# Altium PCB PCB2.PcbDoc
Units mil, origin at the board's own origin, x right, y up, seen from the top; angles counter-clockwise.
Board outline 2020 x 1755 mil, 2 copper layers (Top Layer, Bottom Layer); 13 components, 8 nets, 43 pads, 0 vias.
Unrouted connection lines stored in the file: 29.
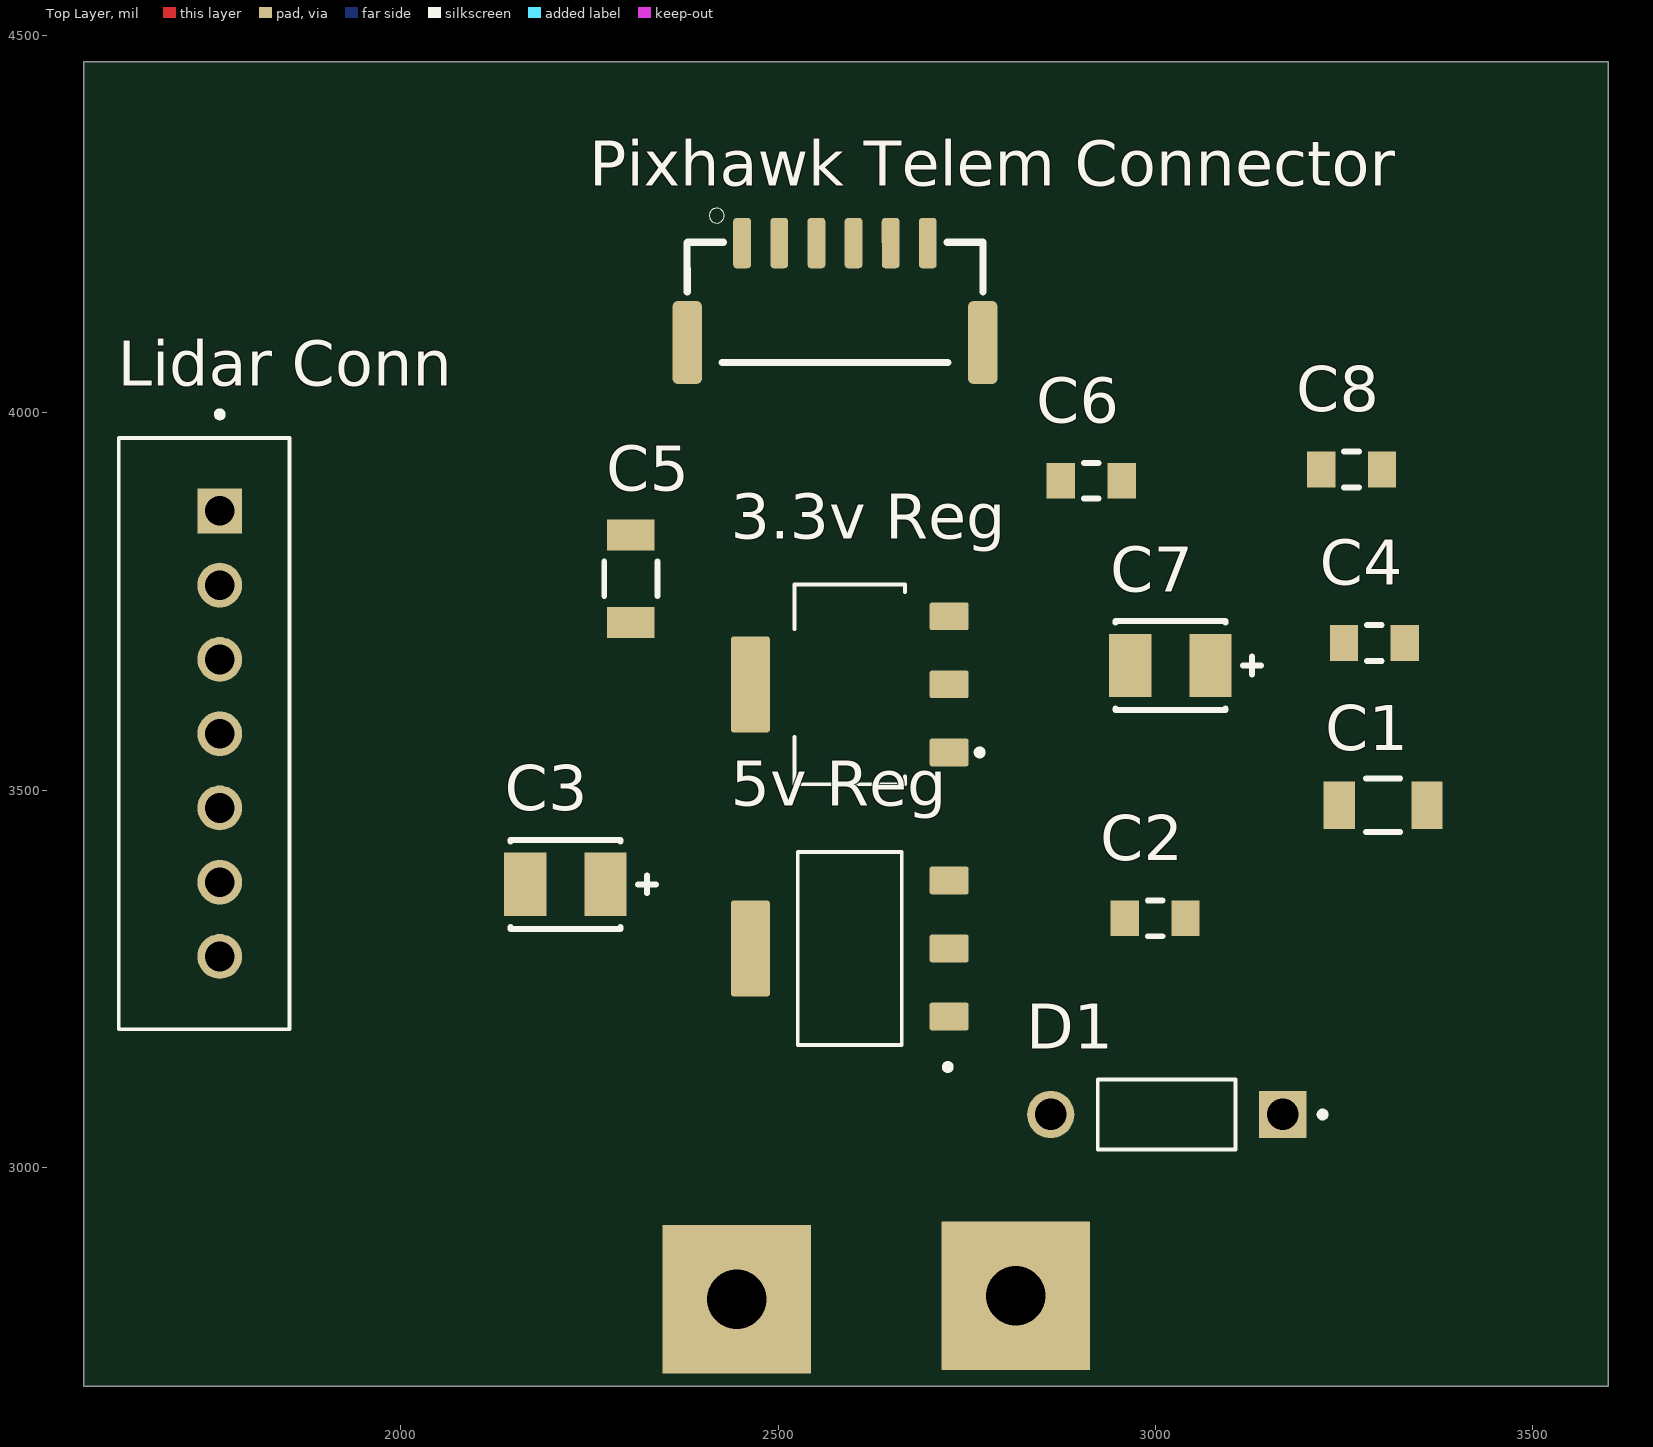
[diagram p0: Top Layer view]
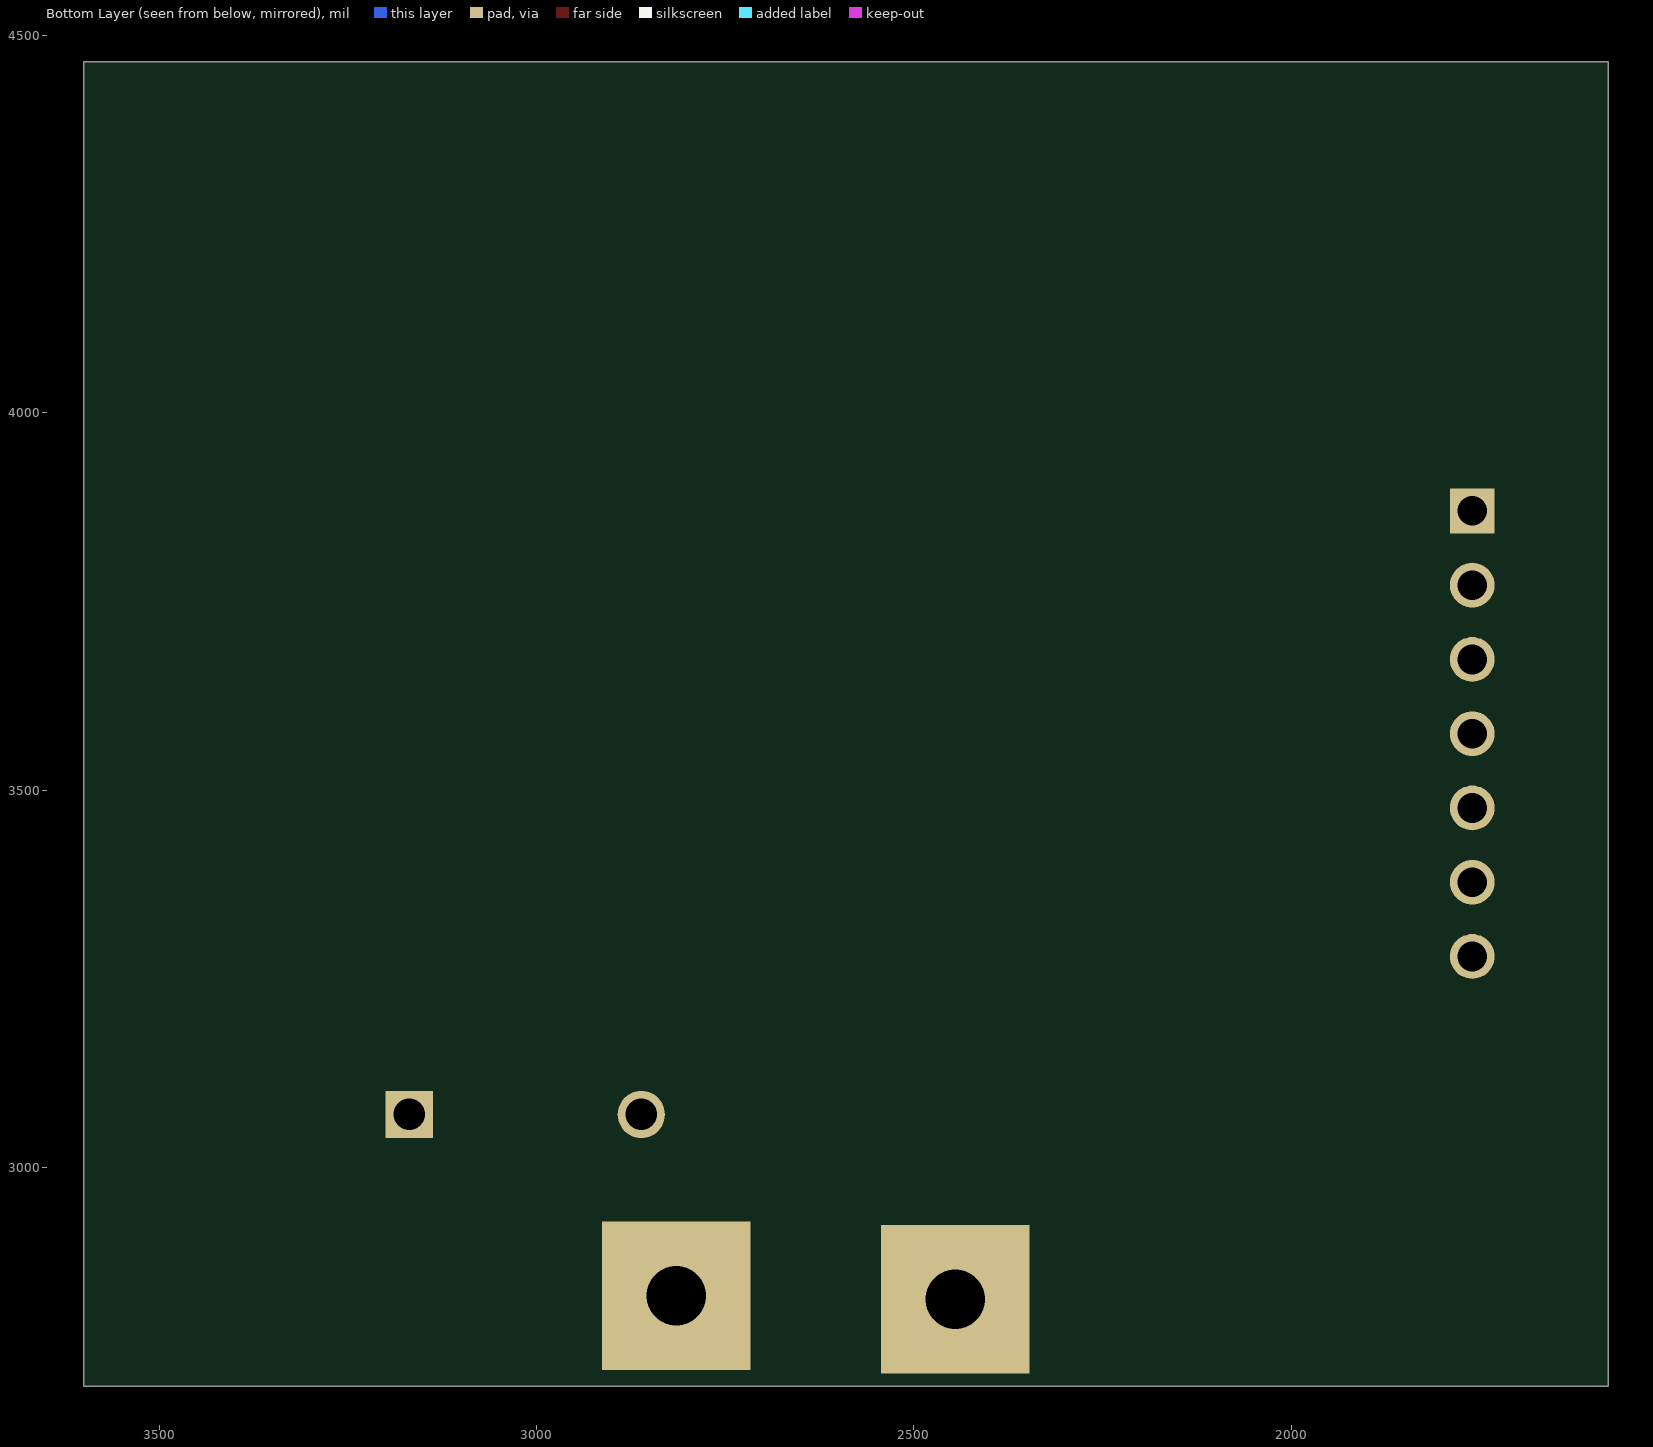
[diagram p1: Bottom Layer view, seen from below]

## Layer stack, top to bottom
Top Solder: solder mask 0.4, Solder Resist, Dk 3.5
Top Layer: signal copper 1.4
Dielectric 1: dielectric 12.6, FR-4, Dk 4.8
Bottom Layer: signal copper 1.4
Bottom Solder: solder mask 0.4, Solder Resist, Dk 3.5

## Board outline
1580,2710 3600,2710 3600,4465 1580,4465

## Design rules (kind name [scope] priority, off if disabled: settings)
Clearance [All] p1: gap=10 ignorepadtopadclearanceinfootprint=FALSE
PolygonConnect [All] p1: connectstyle=Relief reliefconductorwidth=10 reliefentries=4 polygonreliefangle="90 Angle" airgapwidth=10
RoutingVias [All] p1: holewidth=28 width=50 viastyle="Through Hole" minholewidth=28 minwidth=50 maxholewidth=28 maxwidth=50
SolderMaskExpansion [All] p1: expansion=4 istentingtop=FALSE
SupplyNets "Schematic Supply Nets_4" [InNet('GND')] p1: voltage=0.000
SupplyNets "Schematic Supply Nets_2" [InNet('+3')] p2: voltage=0.000
SupplyNets "Schematic Supply Nets_1" [InNet('+5')] p3: voltage=0.000
SupplyNets "Schematic Supply Nets" [InNet('VCC (9v-6v)')] p4: voltage=0.000
Width [All] p1: maxlimit=10 minlimit=10 preferedwidth=10
30 further rules are at their usual default settings.

## Components (designator, comment, footprint, x,y, rotation, side; value= is the part's Value field where it differs from the comment)
"3.3v Reg" "AMS1117-3.3" SOT229P700X180-4N 2595,3640 r90 top
"5v Reg" "AMS1117-5.0" SOT229P700X180-4N 2595,3290 r90 top
C1 "10uF" FP-GRM31C-0_2-e0_3_0_8-MFG 3301.93,3480 r0 top
C2 "100nF" FP-CGA3E-0_3-0_1-IPC_A 2999.65,3330 r0 top
C3 "22uF" FP-T491B226K016AT-MFG 2218.15,3375 r0 top
C4 "100nF" FP-CGA3E-0_3-0_1-IPC_A 3290.35,3695 r0 top
C5 "10uF" FP-GRM31C-0_2-e0_3_0_8-MFG 2305,3780 r90 top
C6 "100nF" FP-CGA3E-0_3-0_1-IPC_A 2915,3910 r0 top
C7 "22uF" FP-T491B226K016AT-MFG 3020,3665 r0 top
C8 "100nF" FP-CGA3E-0_3-0_1-IPC_A 3260,3925 r0 top
D1 "1N4007-T" DIOAD780W78L463D236 3015,3070 r180 top
"Lidar Conn" "B7B-XH-A(LF)(SN)" JST_B7B-XH-A(LF)(SN) 1739.33,3574.72 r90 top
"Pixhawk Telem Connector" "JST-GH1.25 6pin" BM06B-GHS-TBT 2451.73,4155.67 r0 top

## Footprints (in the part's own frame and the unit in brackets; to place one, negate y for a bottom-side part, rotate by r counter-clockwise, add the part's x,y. Pads: shape width x height; smd on the part's side, far side on the other; paste and mask are expansions set on the pad)
BM06B-GHS-TBT [mm]
  rrect40% 0.6x1.7 smd rot 0.05: 1(0.015,1.761) 2(1.266,1.761) 3(2.515,1.761) 4(3.766,1.761) 5(5.016,1.761) 6(6.266,1.761)
  rrect40% 1x2.8 smd: 13(-1.834,-1.589) 14(8.117,-1.589)
  silkscreen extent -1.84,-2.26 8.13,2.93, body extent -5.38,-2.12 5.38,2.83, height 4.05
DIOAD780W78L463D236 [mm]
  round 1.59 hole 1.06: A(3.905,0)
  rect 1.59x1.59 / inner round 1.59 / far side rect 1.59x1.59 hole 1.06: K(-3.905,0)
  silkscreen extent -5.35,-1.18 2.32,1.18
FP-CGA3E-0_3-0_1-IPC_A [mm]
  rect 0.956x1.206 smd paste+0 mask+0: 1(-1.025,0) 2(1.025,0)
  silkscreen extent -0.25,-0.6 0.25,0.6, body extent -2,-1.1 2,1.1, height 0.25
FP-GRM31C-0_2-e0_3_0_8-MFG [mm]
  rect 1.05x1.6 smd paste+0 mask+0: 1(-1.475,0) 2(1.475,0)
  silkscreen extent -0.58,-0.9 0.58,0.9, body extent -2.1,-1 2.1,1, height 0.25
FP-T491B226K016AT-MFG [mm]
  rect 1.42x2.13 smd paste+0 mask+0: 1(-1.35,0) 2(1.35,0)
  silkscreen extent -1.85,-1.5 3.05,1.5, body extent -2.18,-1.62 2.18,1.62, height 0.25
JST_B7B-XH-A(LF)(SN) [mm]
  rect 1.508x1.508 / inner round 1.508 / far side rect 1.508x1.508 hole 1: 1(7.5,-0.525)
  round 1.508 hole 1: 2(5,-0.525) 3(2.5,-0.525) 4(0,-0.525) 5(-2.5,-0.525) 6(-5,-0.525) 7(-7.5,-0.525)
  silkscreen extent -9.95,-2.88 10.85,2.88, body extent -9.95,-2.88 9.95,2.88, height 7
SOT229P700X180-4N [mm]
  rrect15% 0.93x1.31 smd: 1(-2.29,-3.345) 2(0,-3.345) 3(2.29,-3.345)
  rrect15% 3.24x1.31 smd: 4(0,3.345)
  silkscreen extent -3.36,-4.47 3.36,1.86, body extent -3.5,-3.15 3.5,3.15, height 1.8

## Part data
"3.3v Reg": "Linear Voltage Regulator IC Positive Fixed 1 Output 1A SOT-223-3L", Package="SOT-223-3L UMW", Check_prices=https://www.snapeda.com/parts/AMS1117-3.3/UMW/view-part/?ref=eda, MF=UMW, MP=AMS1117-3.3, SnapEDA_Link=https://www.snapeda.com/parts/AMS1117-3.3/UMW/view-part/?ref=snap
"5v Reg": "1A LOW DROPOUT VOLTAGE REGULATOR", Package="SOT-223 Seeed Technology", Availability="Not in stock", Check_prices=https://www.snapeda.com/parts/AMS1117-5.0/ams/view-part/?ref=eda, MF=ams, MP=AMS1117-5.0, Price=None, SnapEDA_Link=https://www.snapeda.com/parts/AMS1117-5.0/ams/view-part/?ref=snap
C1 C5: library part CMP-06035-005515-1, "Chip Multilayer Ceramic Capacitors for General Purpose, 1206, 10uF, X7R, 15%, 10%, 25V", Case/Package=1206, Dielectric=X7R, Max Operating Temperature=125°C, Min Operating Temperature=-55°C, Tolerance=10%, Voltage=25V, Capacitance=10uF, Lead Free="Lead Free", Length=0.126inch, Mount="Surface Mount", Packaging="Tape and Reel", Thickness=0.071inch, Voltage Rating=25V, Voltage Rating (DC)=25V, Width=0.063inch
C2 C4 C6 C8: library part CMP-2000-07546-2, "Cap Ceramic 100nF 50V X7R 10% Pad SMD 0603 +125°C Automotive T/R", Case Code (Imperial)=0603, Case Code (Metric)=1608, Dielectric=X7R, Max Operating Temperature=125°C, Min Operating Temperature=-55°C, Package Quantity=1, Ratings=AEC-Q200, Tolerance=10%, Voltage=50V, Capacitance=100nF, Case/Package=0603, Composition=Ceramic, Depth=0.8mm, Height=0.8mm, Lead Free="Lead Free", Length=1.6mm, Mount="Surface Mount", Packaging="Tape and Reel", Radiation Hardening=No, REACH SVHC="No SVHC", Termination=SMD/SMT, Thickness=0.035inch, Voltage Rating=50V, Voltage Rating (DC)=50V, Weight=7.1E-05oz, Width=0.8mm
C3 C7: library part CMP-03017-000029-1, "CAP TANT 22UF 10% 16V 1411", Case Code (Imperial)=1411, Case Code (Metric)=3528, Dielectric Material=Tantalum, ESR (Equivalent Series Resistance)=2.2R, Leakage Current=3.6uA, Max Operating Temperature=125°C, Min Operating Temperature=-55°C, Package Quantity=1, Tolerance=10%, Voltage=16V, Capacitance=22uF, Case/Package=1411, Depth=2.8mm, Dissipation Factor=6%, Failure Rate=0.001%, Features="General Purpose", Height=1.9mm, Height - Seated (Max)=0.083inch, Lead Free="Lead Free", Lead Pitch=1.9mm, Length=3.5mm, Life (Hours)=2000Hour, Mount="Surface Mount", Number of Pins=2, Packaging="Tape and Reel", Polarity=Polar, Radiation Hardening=No, REACH SVHC="No SVHC", RoHS Compliant=Yes, Termination=SMD/SMT, Voltage Rating=16V, Voltage Rating (DC)=16V, Weight=0.002293oz, Width=2.8mm
D1: Package=None, Availability=Unavailable, MF="{'manufacturer': u'Diodes Incorporated'}", MP=1N4007-T, Price=None
"Lidar Conn": "Connector Header Through Hole 7 position 0.098 (2.50mm)", Package=None, Check_prices=https://www.snapeda.com/parts/B7B-XH-A(LF)(SN)/JST/view-part/?ref=eda, MF="JST Sales America Inc.", MP=B7B-XH-A(LF)(SN), SnapEDA_Link=https://www.snapeda.com/parts/B7B-XH-A(LF)(SN)/JST/view-part/?ref=snap
"Pixhawk Telem Connector": library part BM06B-GHS-TBT, "Connector Header Surface Mount 6 position 0.049\" (1.25mm)", Package=None, Availability=Unavailable, Check_prices=https://www.snapeda.com/parts/BM06B-GHS-TBT/JST/view-part/?ref=eda, MF="JST Sales", MP=BM06B-GHS-TBT, Price=None, SnapEDA_Link=https://www.snapeda.com/parts/BM06B-GHS-TBT/JST/view-part/?ref=snap

## Free pads (board coordinates)
  rect 196.85x196.85 hole 78.74: PAD-5X5-GND-2.0DR(2815,2830) PAD-5X5-PWR-2.0DR(2445,2825)

## Nets (pads, with @x,y where several pads share a name; then routed paths per layer and width w, separated by ;. In a path a pad name is that pad's centre, name@x,y a point inside that pad or via, vN(x,y) a via of type N, cw(c..) or ccw(c..) an arc to the next point about the centre after c; other vN are vias at no path point)
+3: "3.3v Reg.2" C7.2 C8.1
+5: "3.3v Reg.3" "5v Reg.2" C3.2 C4.1 C5.1 C6.1
GND: "3.3v Reg.1" "5v Reg.1" "Lidar Conn.4" "Lidar Conn.5" "Pixhawk Telem Connector.1" C1.2 C2.2 C3.1 C4.2 C5.2 C6.2 C7.1 C8.2 pad.PAD-5X5-GND-2.0DR
"Net5v Reg_3": "5v Reg.3" C1.1 C2.1 D1.K
"NetLidar Conn_1": "Lidar Conn.1" "Pixhawk Telem Connector.4"
"NetLidar Conn_2": "Lidar Conn.2" "Pixhawk Telem Connector.5"
"NetLidar Conn_3": "Lidar Conn.3" "Pixhawk Telem Connector.6"
"VCC (9v-6v)": "Lidar Conn.6" "Lidar Conn.7" D1.A pad.PAD-5X5-PWR-2.0DR
pads on no net: "3.3v Reg.4" "5v Reg.4" "Pixhawk Telem Connector.2" "Pixhawk Telem Connector.3" "Pixhawk Telem Connector.13" "Pixhawk Telem Connector.14"